# Altium PCB Dispenser.PcbDoc
Units mil, origin at the board's own origin, x right, y up, seen from the top; angles counter-clockwise.
Board outline 1905 x 1590 mil, 2 copper layers (Top Layer, Bottom Layer), stack 62.249 mil thick; 21 components, 11 nets, 75 pads, 9 vias.
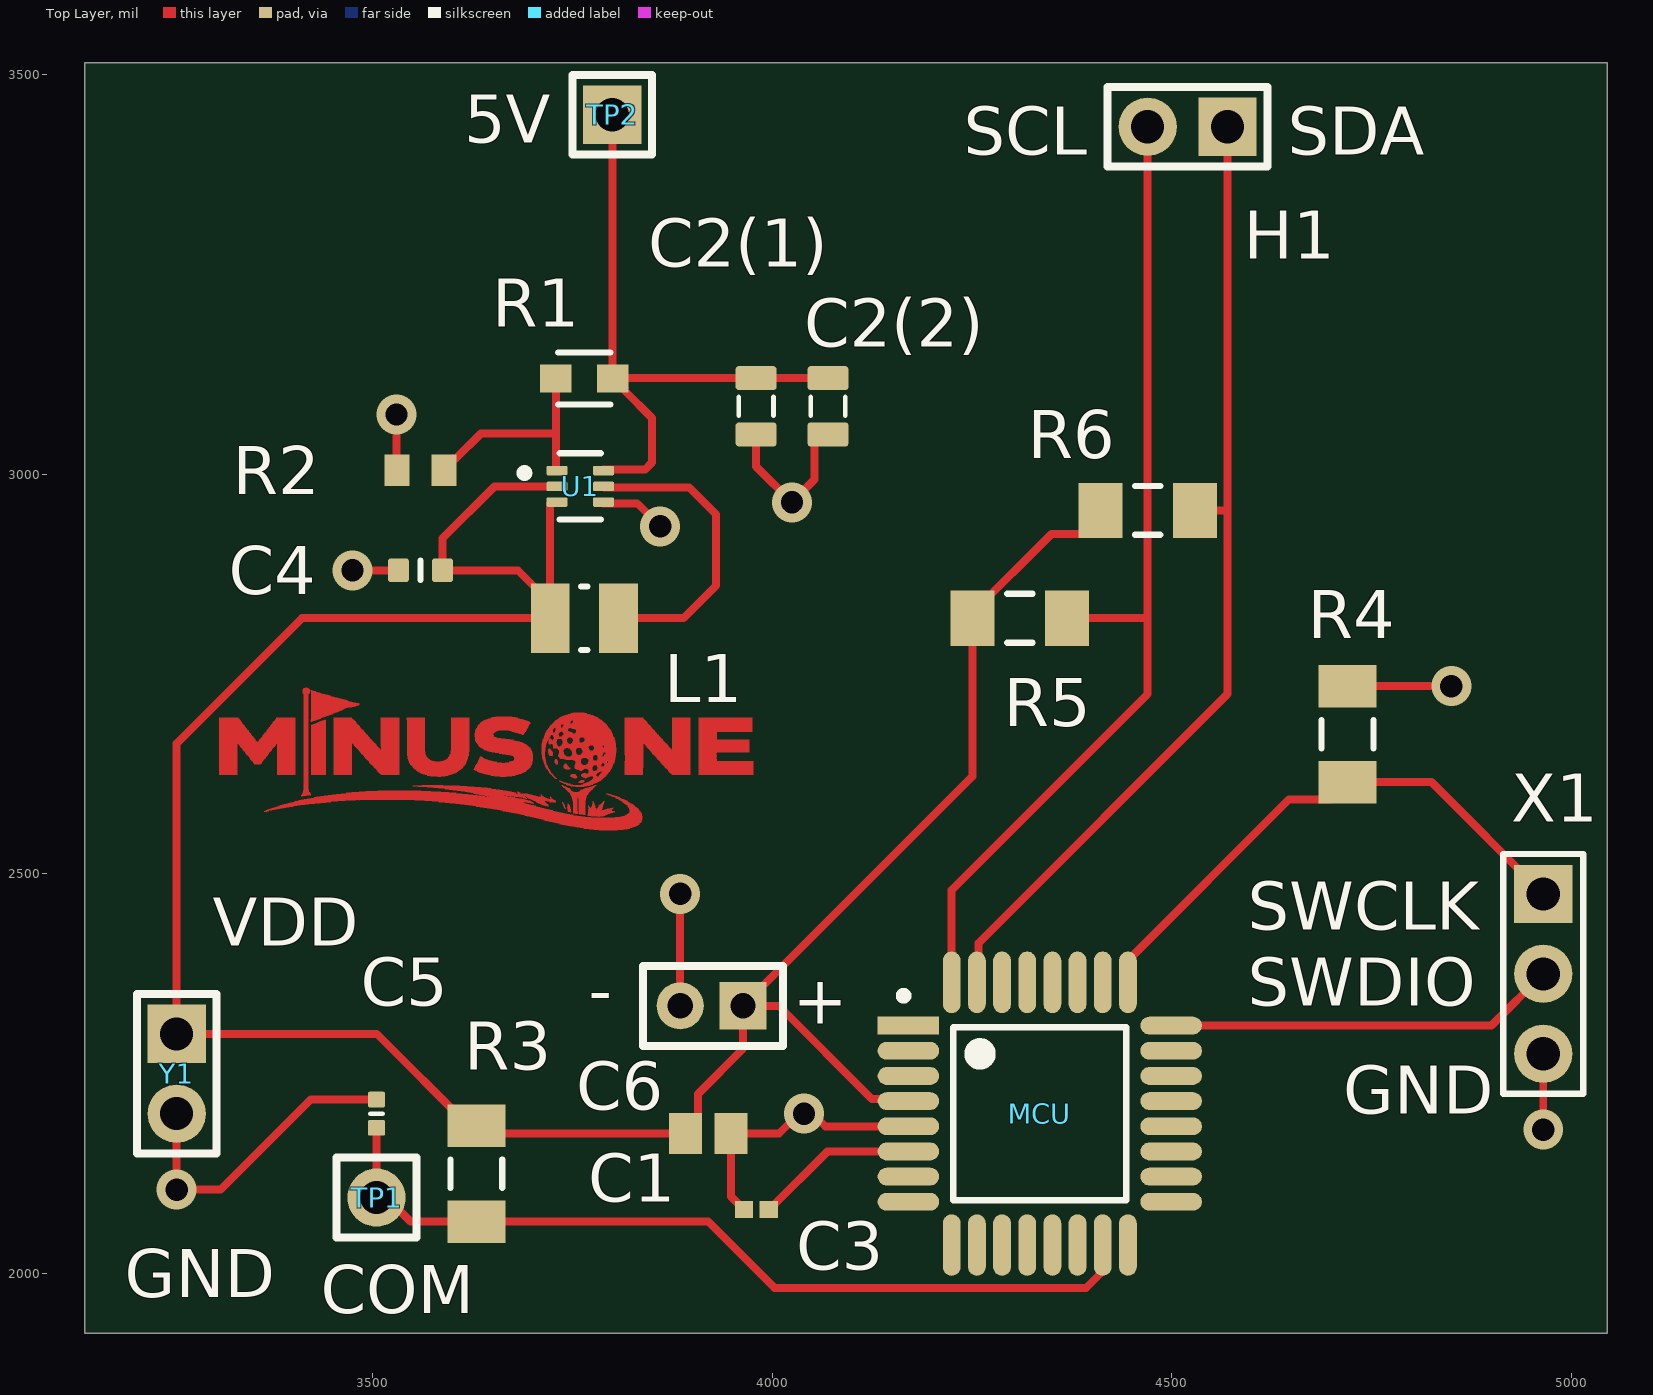
[diagram p0: Top Layer view]
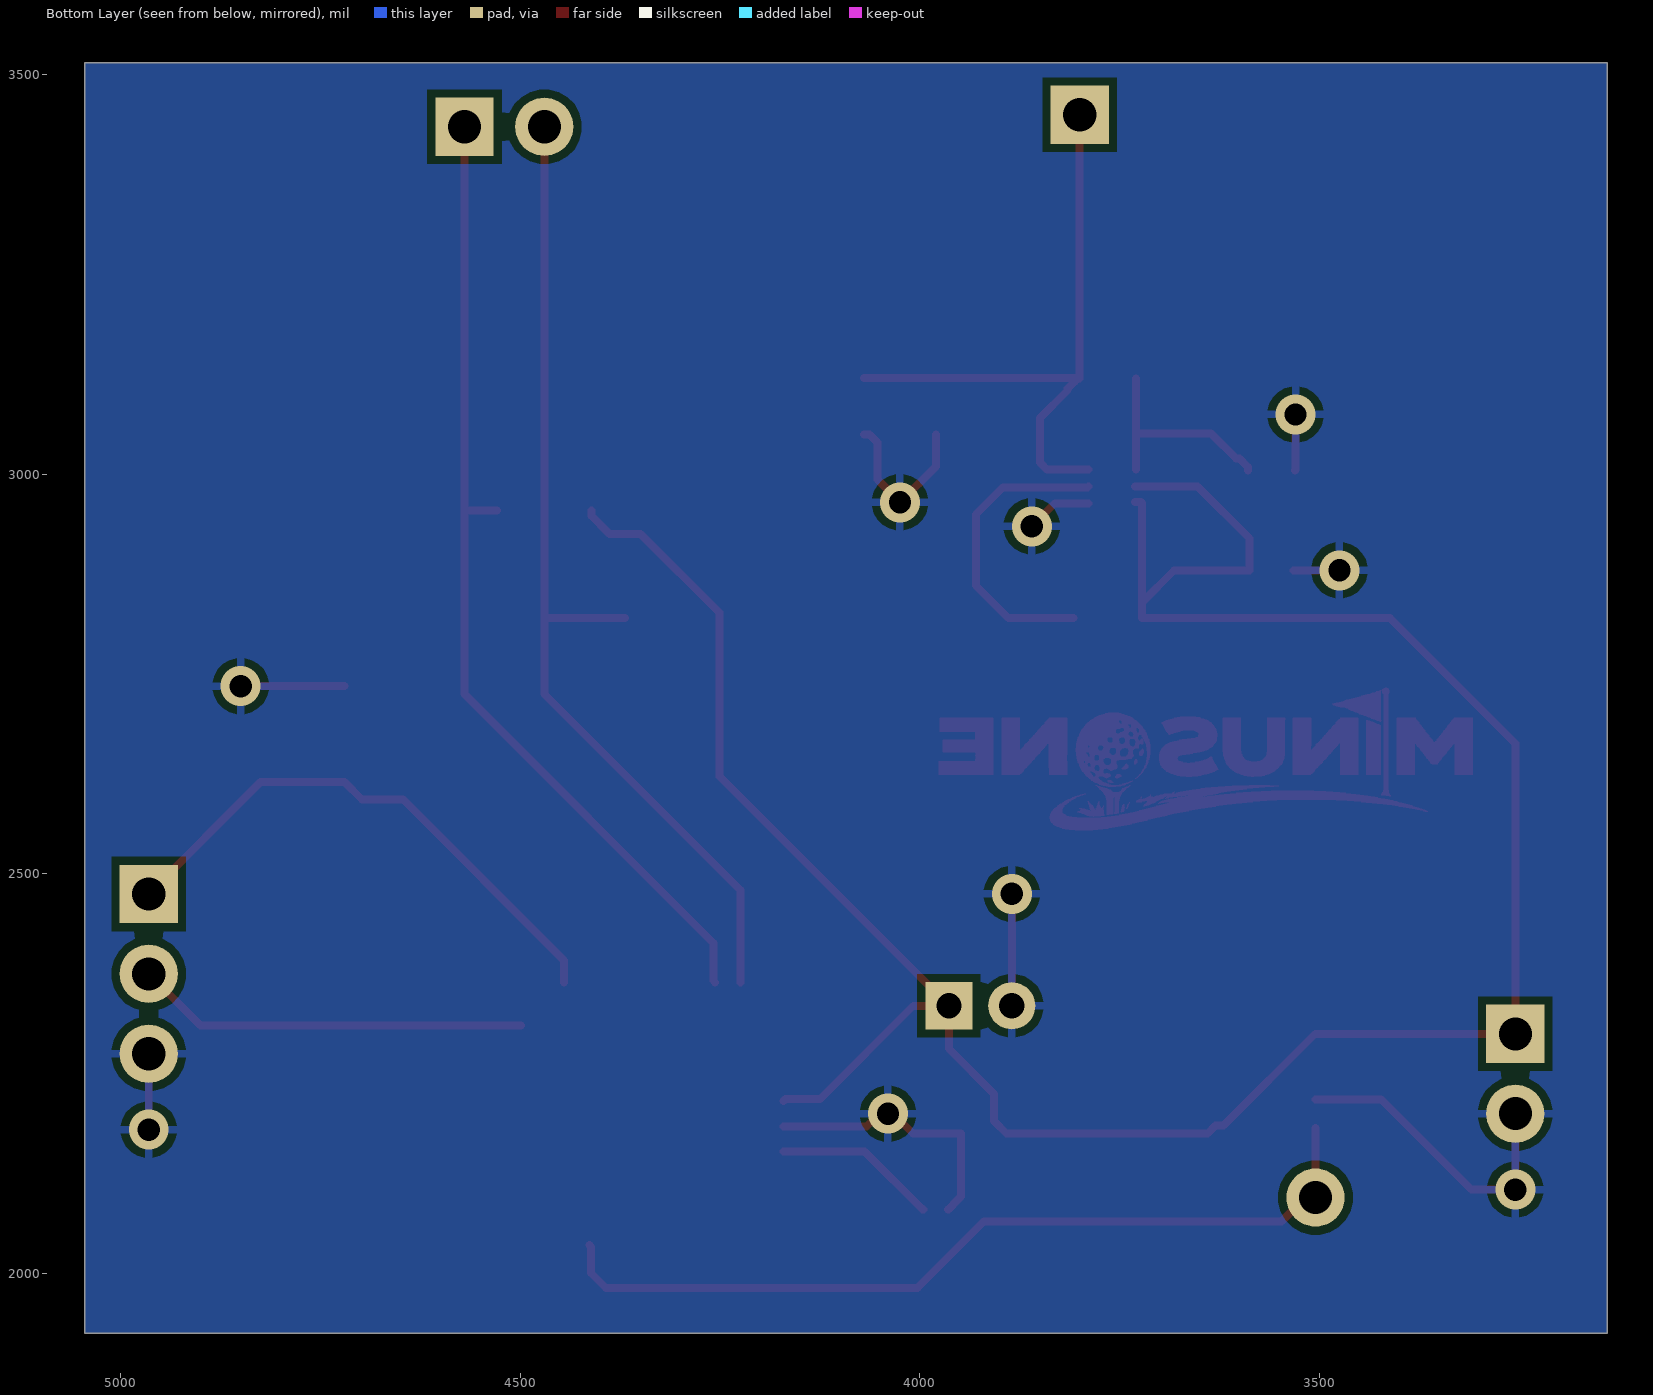
[diagram p1: Bottom Layer view, seen from below]
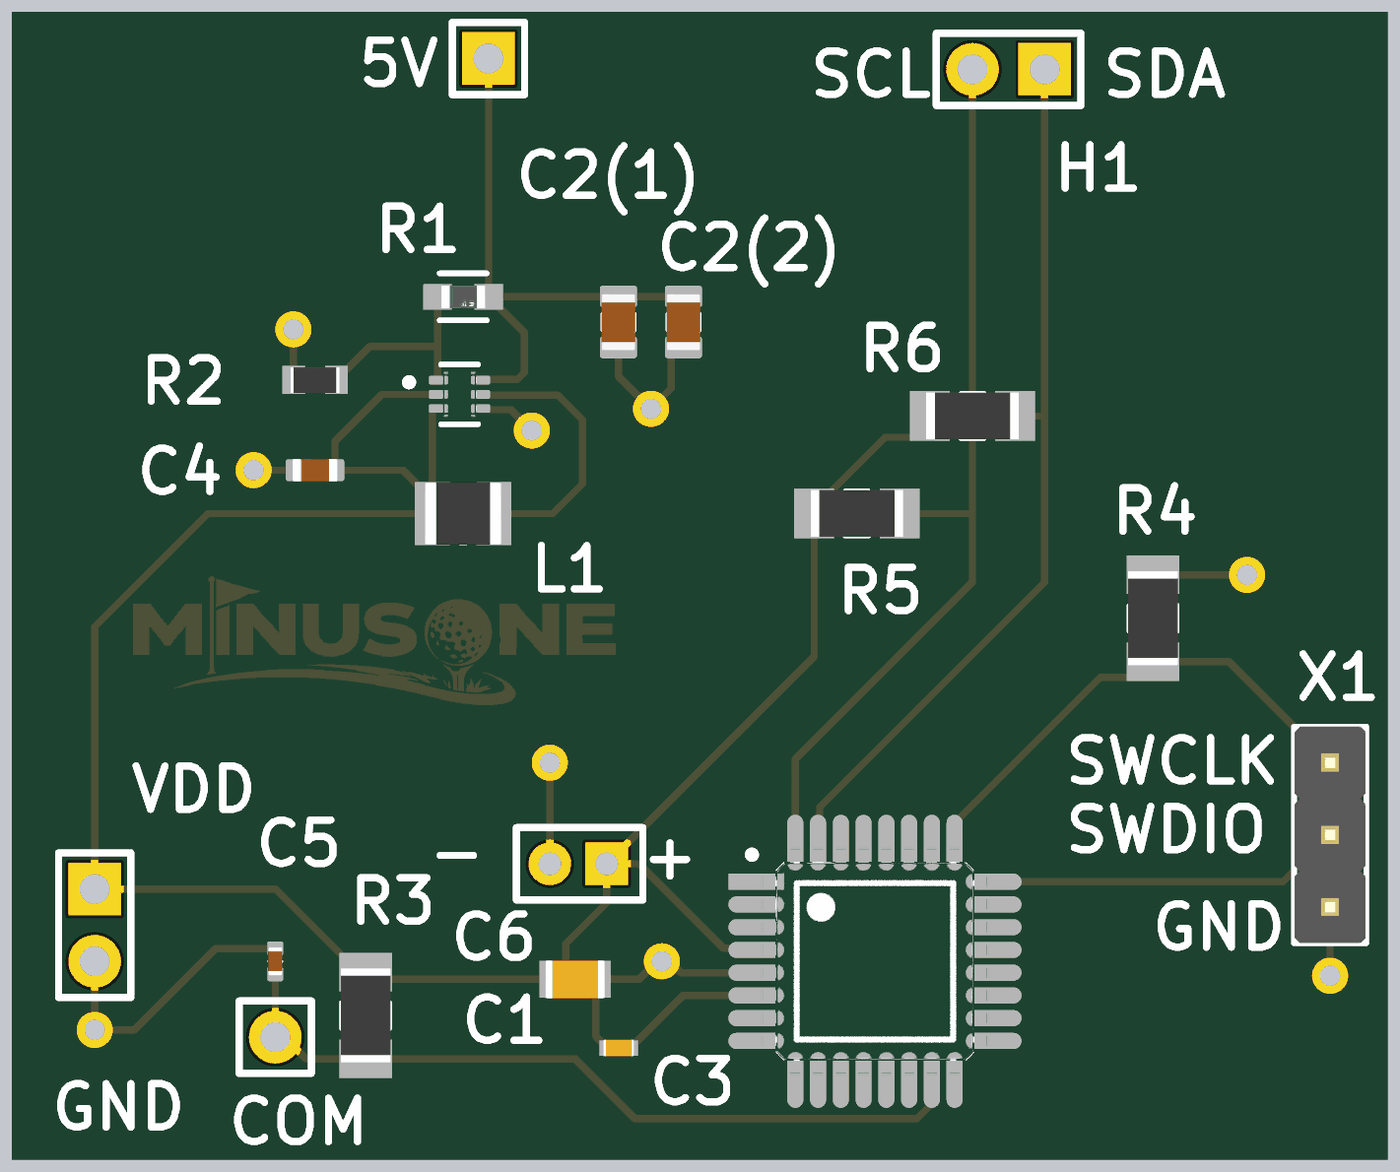
[diagram p2: 3D render of the assembled board from above, using the file's embedded part models]

## Layer stack, top to bottom
Top Solder: solder mask 0.4, Solder Resist, Dk 3.5
Top Layer: signal copper 1.4
Dielectric 1: dielectric 59.4488, FR-4, Dk 4.8
Bottom Layer: signal copper 1.4
Bottom Solder: solder mask 0.4, Solder Resist, Dk 3.5

## Board outline
3140,1925 3140,3515 5045,3515 5045,1925

## Design rules (kind name [scope] priority, off if disabled: settings)
Clearance [All] p1: gap=10 ignorepadtopadclearanceinfootprint=FALSE
PolygonConnect [All] p1: connectstyle=Relief reliefconductorwidth=10 reliefentries=4 polygonreliefangle="90 Angle" airgapwidth=10
RoutingVias [All] p1: holewidth=28 width=50 viastyle="Through Hole" minholewidth=28 minwidth=50 maxholewidth=28 maxwidth=50
SolderMaskExpansion [All] p1: expansion=0 istentingtop=FALSE
SupplyNets "Schematic Supply Nets_2" [InNet('VDD')] p1: voltage=0.000
SupplyNets "Schematic Supply Nets_1" [InNet('GND')] p2: voltage=0.000
Width [All] p1: maxlimit=10 minlimit=10 preferedwidth=10
30 further rules are at their usual default settings.

## Components (designator, comment, footprint, x,y, rotation, side; value= is the part's Value field where it differs from the comment)
C1 "Capacitor 100 nF +/-10% 50 V 0805" CAPC2013X95X50LL10T25 3920,2175 r0 top value=100nF
C2(1) "Capacitor 22µF +/-40% 16V 0805" CAPC0805(2012)145_L 3980,3085 r270 top value=22µF
C2(2) "Capacitor 22µF +/-40% 16V 0805" CAPC0805(2012)145_L 4070,3085 r270 top value=22µF
C3 "Capacitor 0.1 uF +/- 5% 16 V 0402" CAPC1005X56X25LL10T15 3980.35,2080 r180 top value=100nF
C4 "Capacitor 10µF +/-20% 10V 0603" CAPC0603(1608)100_L 3560,2880 r180 top value=10µF
C5 "Capacitor 100nF +/-20% 10V 0402" CAPC0402(1005)60_L 3505,2200 r90 top value=100nF
C6 "Capacitor Pad" CAP_PAD 3963.74,2335 r180 top
H1 "I2C Header" HEADER_1X02 4570,3435 r180 top
L1 "LQM2HPN1R0MJ0L" INDC2520X120X60NL20T20 3765,2820 r0 top value=1µH
MCU "STM32G030K8T6" FP-LQFP32-5V-IPC_A 4335,2200 r0 top
R1 "CPF0603B732KE" FP-CPF0603-MFG 3765,3120 r180 top value=732KΩ
R2 "Resistor 100k +/-1% 0603 100 mW" RESC1608X55X25ML10T15 3560,3005 r180 top value=100k
R3 "Resistor 10k +/-1% 1206 250 mW" RESC3216X60X45ML15T20 3630,2125 r90 top value=10k
R4 "Resistor 10k +/-1% 1206 250 mW" RESC3216X60X45ML15T20 4720,2675 r90 top value=10k
R5 "Resistor 4k7 +/-1% 1206 250 mW" RESC3116X70X50ML13T20 4310,2820 r180 top value=4.7k
R6 "Resistor 4k7 +/-1% 1206 250 mW" RESC3116X70X50ML13T20 4470,2955 r180 top value=4.7k
TP1 "Lim Switch COM" HEADER_1X01 3505,2095 r90 top
TP2 "5V Pad" PAD_5V 3800,3450 r0 top
U1 "TPS61023DRLR" FP-DRL0006A-MFG 3760,2985 r0 top
X1 "Jumper" PIN_3_JUMPER 4965,2475 r270 top
Y1 "Battery Header" BATTERY_HEADER 3255,2300 r270 top

## Footprints (in the part's own frame and the unit in brackets; to place one, negate y for a bottom-side part, rotate by r counter-clockwise, add the part's x,y. Pads: shape width x height; smd on the part's side, far side on the other; paste and mask are expansions set on the pad)
BATTERY_HEADER [mm] "Battery Header"
  rect 1.85x1.85 hole 1.05 mask+0.102: 1(0,0)
  round 1.85 hole 1.05 mask+0.102: 2(2.54,0)
  silkscreen extent -1.27,-1.27 3.81,1.27
CAP_PAD [mm] "Capacitor solder pads"
  rect 1.5x1.5 hole 0.8 mask+0.102: 1(0,0)
  round 1.5 hole 0.8 mask+0.102: 2(2,0)
  silkscreen extent -1.27,-1.27 3.17,1.27
CAPC0402(1005)60_L [mm] "Chip Capacitor, Body 1.0x0.5mm, Height 0.6mm, IPC High Density"
  rrect25% 0.5x0.55 smd: 1(-0.45,0) 2(0.45,0)
  silkscreen extent 0,-0.2 0,0.2, body extent -0.5,-0.25 0.5,0.25, height 0.6
CAPC0603(1608)100_L [mm] "Chip Capacitor, Body 1.6x0.8mm, Height 1.0mm, IPC High Density"
  rrect25% 0.66x0.76 smd: 1(-0.7,0) 2(0.7,0)
  silkscreen extent 0,-0.3 0,0.3, body extent -0.8,-0.4 0.8,0.4, height 0.95
CAPC0805(2012)145_L [mm] "Chip Capacitor, Body 2.0x1.2mm, Height 1.45mm, IPC High Density"
  rrect25% 0.76x1.3 smd: 1(-0.9,0) 2(0.89,0)
  silkscreen extent -0.3,-0.55 0.3,0.55, body extent -1,-0.6 1,0.6, height 1.45
CAPC1005X56X25LL10T15 [mm] "Chip Capacitor, 2-Leads, Body 1.10x0.60mm, IPC High Density"
  rect 0.58x0.54 smd: 1(-0.39,0) 2(0.39,0)
  body extent -0.55,-0.3 0.55,0.3, height 0.56
CAPC2013X95X50LL10T25 [mm] "Chip Capacitor, 2-Leads, Body 2.10x1.35mm, IPC High Density"
  rect 1.05x1.3 smd: 1(-0.725,0) 2(0.725,0)
  body extent -1.05,-0.67 1.05,0.67, height 0.95
FP-CPF0603-MFG [mm]
  rect 1x0.9 smd paste+0 mask+0: 1(-0.9,0) 2(0.9,0)
  silkscreen extent -0.82,-0.82 0.82,0.82, body extent -1.5,-0.55 1.5,0.55, height 0.25
FP-DRL0006A-MFG [mm]
  rrect33% 0.67x0.3 smd paste+0 mask+0: 1(-0.74,0.5) 2(-0.74,0) 3(-0.74,-0.5) 4(0.74,-0.5) 5(0.74,0) 6(0.74,0.5)
  silkscreen extent -1.9,-1.05 0.65,1.05, body extent -1.17,-1.1 1.17,1.1, height 0.25
FP-LQFP32-5V-IPC_A [mm]
  rect 1.955x0.566 smd paste+0 mask+0: 1(-4.175,2.8)
  rrect100% 1.955x0.566 smd paste+0 mask+0: 2(-4.175,2) 3(-4.175,1.2) 4(-4.175,0.4) 5(-4.175,-0.4) 6(-4.175,-1.2) 7(-4.175,-2) 8(-4.175,-2.8) 17(4.175,-2.8) 18(4.175,-2) 19(4.175,-1.2) 20(4.175,-0.4) 21(4.175,0.4) 22(4.175,1.2) 23(4.175,2) 24(4.175,2.8)
  rrect100% 0.566x1.955 smd paste+0 mask+0: 9(-2.8,-4.175) 10(-2,-4.175) 11(-1.2,-4.175) 12(-0.4,-4.175) 13(0.4,-4.175) 14(1.2,-4.175) 15(2,-4.175) 16(2.8,-4.175) 25(2.8,4.175) 26(2,4.175) 27(1.2,4.175) 28(0.4,4.175) 29(-0.4,4.175) 30(-1.2,4.175) 31(-2,4.175) 32(-2.8,4.175)
  silkscreen extent -4.45,-2.75 2.75,3.87, body extent -5.65,-5.65 5.65,5.65, height 0.25
HEADER_1X01 [mm]
  round 1.85 hole 1.05 mask+0.102: 1(0,0)
  silkscreen extent -1.27,-1.27 1.27,1.27
HEADER_1X02 [mm] "Jumper"
  rect 1.85x1.85 hole 1.05 mask+0.102: 1(0,0)
  round 1.85 hole 1.05 mask+0.102: 2(2.54,0)
  silkscreen extent -1.27,-1.27 3.81,1.27
INDC2520X120X60NL20T20 [mm] "Chip Inductor, 2-Leads, Body 2.70x2.20mm, IPC Medium Density"
  rect 1.23x2.22 smd: 1(-1.085,0) 2(1.085,0)
  silkscreen extent -0.1,-1.01 0.1,1.01, body extent -1.35,-1.1 1.35,1.1, height 1.2
PAD_5V [mm]
  rect 1.85x1.85 hole 1.05 mask+0.102: 1(0,0)
  silkscreen extent -1.27,-1.27 1.27,1.27
PIN_3_JUMPER [mm]
  rect 1.85x1.85 hole 1.05 mask+0.102: 1(0,0)
  round 1.85 hole 1.05 mask+0.102: 2(2.54,0) 3(5.08,0)
  silkscreen extent -1.27,-1.27 6.35,1.27, body extent -1.27,-1.24 6.35,1.24, height 8.38
RESC1608X55X25ML10T15 [mm] "Chip Resistor, 2-Leads, Body 1.70x0.90mm, IPC Low Density"
  rect 0.8x1 smd: 1(-0.75,0) 2(0.75,0)
  body extent -0.85,-0.45 0.85,0.45, height 0.55
RESC3116X70X50ML13T20 [mm] "Chip Resistor, 2-Leads, Body 3.25x1.65mm, IPC Low Density"
  rect 1.4x1.75 smd: 1(-1.5,0) 2(1.5,0)
  silkscreen extent -0.4,-0.77 0.4,0.77, body extent -1.63,-0.82 1.63,0.82, height 0.7
RESC3216X60X45ML15T20 [mm] "Chip Resistor, 2-Leads, Body 3.3x1.75mm, IPC Low Density"
  rect 1.35x1.85 smd: 1(-1.525,0) 2(1.525,0)
  silkscreen extent -0.45,-0.82 0.45,0.82, body extent -1.65,-0.87 1.65,0.87, height 0.6

## Part data
C1: library part CMP-001-00018-6, "Chip Capacitor, 100 nF, +/- 10%, 50 V, 0805 (2012 Metric)", Capacitor Type=Ceramic, Case/Package=0805, Max Operating Temperature=125°C, Min Operating Temperature=-55°C, Tolerance=10%, Voltage Rating=50V, Mounting Technology=SM, Pins=2, RoHS Compliant=True
C2(1) C2(2): library part CMP-001-00081-4, "Chip Capacitor, 22µF +/-40%, 16V, 0805, Thickness 1.45 mm", Case/Package=0805, Max Operating Temperature=85°C, Min Operating Temperature=-55°C, Tolerance=5%, Voltage Rating=16V, Mounting Technology=SMT, Pins=2
C3: library part CMP-001-00001-6, "Chip Capacitor, 0.1 uF, +/- 5%, 16 V, 0402 (1005 Metric)", Capacitor Type=Ceramic, Case/Package=0402, Max Operating Temperature=125°C, Min Operating Temperature=-55°C, Tolerance=5%, Voltage Rating=16V, Mounting Technology=SM, Pins=2, RoHS Compliant=True
C4: library part CMP-001-00075-4, "Chip Capacitor, 10µF +/-20%, 10V, 0603, Thickness 1 mm", Case/Package=0603, Max Operating Temperature=85°C, Min Operating Temperature=-55°C, Tolerance=10%, Voltage Rating=10V, Mounting Technology=SMT, Pins=2
C5: library part CMP-001-00061-3, "Chip Capacitor, 100nF +/-20%, 10V, 0402, Thickness 0.6 mm", Case/Package=0402, Max Operating Temperature=85°C, Min Operating Temperature=-55°C, Tolerance=20%, Voltage Rating=10V, Mounting Technology=SMT, Pins=2
C6: library part CAP_PAD
H1: library part HEADER_1X02
L1: library part CMP-006-00008-6, "Chip Inductor, 1 uH, +/- 20%, 1 MHz, -55 to 125 degC, 1008 (2520 Metric), RoHS, Tape and Reel", Case/Package=1008, Current Rating=1.5A, Manufacturer=Murata, Max Operating Temperature=85°C, Min Operating Temperature=-40°C, Package Description="2-Pin Surface Mount Device, Body 2.5 x 2 mm", Package Quantity=3000, Resistance=0.09Ohm, Self Resonant Frequency=70MHz, Tolerance=20%, Core Material=Ferrite, Datasheet URL=http://psearch.en.murata.com/inductor/product/LQM2HPN1R0MJ0%23.pdf, Datasheet Version=Aug-16, Mounting Technology=SM, Package Reference=1008, Packaging=TapeandReel, RoHS Compliant=True, Shielding=Shielded
MCU: library part CMP-12105-000136-1, "IC MCU 32BIT 64KB FLASH 32LQFP", RoHS Compliant=Yes
R1: library part CMP-03211-008829-1, "RES SMD 732KΩ 0.1% 1/16W 0603", Manufacturer="TE Connectivity", Package=CPF0603, Power Rating=0.063W, Resistance=732KΩ, Temperature="-55°C to +155°C", Temperature Coefficient=25ppm/°C, Temperature Range High=+155°C, Temperature Range Low=-55°C, Tolerance=0.1%, Voltage Rating=50V, Automotive=No, Category=Res, ComponentLink2Description=Datasheet, ComponentLink2URL=https://www.te.com/commerce/DocumentDelivery/DDEController?Action=showdoc&DocId=Data+Sheet%7F1773200%7FM%7Fpdf%7FEnglish%7FENG_DS_1773200_M.pdf%7F3-1676481-2, Composition="Thin Film", Device Class L1="Passive Components", Device Class L2=Resistors, Device Class L3="Chip SMD Resistors", Height=0.55mm, Ipc Land Pattern Name=RESC15580X45, Lead Free=Yes, Manufacturer Part Number=CPF0603B732KE, Octopart=https://octopart.com/cpf0603b732ke-te+connectivity-80329877, octopart_url=https://octopart.com/cpf0603b732ke-te+connectivity-80329877, Packaging="5k Reel", RoHS=TRUE, Series=CPF
R2: library part CMP-009-00023-5, "Chip Resistor, 100 KOhm, +/- 1%, 0.1 W, -55 to 155 degC, 0603 (1608 Metric)", Case/Package=0603, Max Operating Temperature=155°C, Min Operating Temperature=-55°C, Power=100mW, Tolerance=1%, Voltage Rating=50V, Mounting Technology=SM, Pins=2, RoHS Compliant=True
R3 R4: library part CMP-009-00016-5, "Chip Resistor, 10 KOhm, +/- 1%, 0.25 W, -55 to 155 degC, 1206 (3216 Metric)", Case/Package=1206, Max Operating Temperature=155°C, Min Operating Temperature=-55°C, Power=250mW, Tolerance=1%, Voltage Rating=200V, Mounting Technology=SM, Pins=2, RoHS Compliant=True
R5 R6: library part CMP-009-00033-5, "Chip Resistor, 4.7 KOhm, +/- 1%, 0.25 W, -55 to 155 degC, 1206 (3216 Metric)", Case/Package=1206, Max Operating Temperature=155°C, Min Operating Temperature=-55°C, Power=250mW, Tolerance=1%, Voltage Rating=200V, Mounting Technology=SM, Pins=2, RoHS Compliant=True
TP1: library part HEADER_1X01
TP2: library part PAD_5V
U1: library part CMP-04918-000638-1, "FINISH GOODS FOR TPS61023"
X1: library part PIN_3_JUMPER
Y1: library part BATTERY_HEADER

## Via types
v1: diameter 50, hole 28, Top Layer to Bottom Layer, 9 vias

## Nets (pads, with @x,y where several pads share a name; then routed paths per layer and width w, separated by ;. In a path a pad name is that pad's centre, name@x,y a point inside that pad or via, vN(x,y) a via of type N, cw(c..) or ccw(c..) an arc to the next point about the centre after c; other vN are vias at no path point)
GND: C1.2 C2(1).2 C2(2).2 C3.2 C4.2 C5.2 C6.2 MCU.5 R2.2 R4.2 U1.4 X1.3 Y1.2 | length 1519.6
  Top Layer w10: Y1.2 v1(3255,2105) 3310,2105 3422.72,2217.72 C5.2 ; v1(3475,2880) C4.2 ; v1(3530,3075) 3530,3005.47 R2.2 ; U1.4@3789.13,2963.78 3831.22,2963.78 v1(3860,2935) ; C6.2 v1(3885,2475) ; C3.2 3964.21,2080 3958.58,2085.63 3958.58,2086.42 3948.54,2096.46 C1.2 4008.43,2175 4033.43,2200 v1(4040,2200) 4050.82,2200 4066.57,2184.25 MCU.5 ; 3980,3049.96 3980,3010 v1(4025,2965) 4025,2965.27 4053.15,2993.42 4053.15,3040 4063.11,3049.96 4070,3049.96 ; R4.2 v1(4850,2735.04) ; v1(4965,2180) X1.3
NetC2(1)_1: C2(1).1 C2(2).1 R1.1 TP2.1 U1.6 | length 784.1
  Top Layer w10: U1.6@3789.13,3005.91 3840.8,3005.91 3849.89,3015 3849.89,3070.54 3815.12,3105.31 3815.12,3107.28 R1.1@3805.98,3116.42 ; TP2.1 3800.43,3449.57 R1.1 3800.87,3120.43 3980,3120.43 4070,3120.43
NetC3_1: C3.1 MCU.6 | length 205
  Top Layer w10: C3.1 3996.5,2080 4069.25,2152.76 MCU.6
NetC5_1: C5.1 MCU.15 R3.1 TP1.1 | length 1084.2
  Top Layer w10: C5.1 TP1.1 3517.64,2095 3547.68,2064.96 R3.1 3920.04,2064.96 4002.88,1982.12 4393.07,1982.12 4411.39,2000.44 4411.39,2033.26 MCU.15
NetH1_1: H1.1 MCU.31 R6.1 | length 1241.5
  Top Layer w10: MCU.31 4258.61,2366.74 4258.61,2413.61 4570,2725 H1.1 ; R6.1 4570,2955
NetH1_2: H1.2 MCU.32 R5.1 | length 1273.1
  Top Layer w10: MCU.32 4224.76,2479.76 4470,2725 4470,2820 ; R5.1 4470,2820 ; H1.2 4470,2820
NetL1_2: L1.2 U1.5 | length 383.8
  Top Layer w10: U1.5 3790.35,2983.78 3896.22,2983.78 3930,2950 3930,2860.7 3889.3,2820 L1.2
NetMCU_24: MCU.24 X1.2 | length 492.4
  Top Layer w10: MCU.24 4900.24,2310.24 X1.2
NetMCU_25: MCU.25 R4.1 X1.1 | length 697.5
  Top Layer w10: MCU.25 4445.24,2391.74 4646.88,2593.39 4698.43,2593.39 R4.1 4825.04,2614.96 X1.1
NetR1_2: R1.2 R2.1 U1.1 | length 275.2
  Top Layer w10: R2.1 3589.53,3008.94 3600.28,3019.69 3604.21,3019.69 3635.77,3051.24 3729.57,3051.24 ; U1.1@3729.57,3006.34 3729.57,3051.24 ; R1.2 3729.57,3051.24
VDD: C1.1 C4.1 C6.1 L1.1 MCU.4 R3.2 R5.2 R6.2 U1.2 U1.3 Y1.1 | length 3372.6
  Top Layer w10: U1.3 3723.58,2965.32 3722.28,2964.02 L1.1@3722.28,2839.49 ; U1.2 3652.56,2985 3587.56,2920 C4.1 3681.77,2880 L1.1@3722.28,2839.49 ; MCU.4 4168.26,2218.1 4125.17,2218.1 4008.27,2335 C6.1 ; R6.2 4410.94,2948.11 4388.39,2925.55 4349.61,2925.55 4250.94,2826.89 R5.2 4250.94,2622.2 C6.1 ; L1.1@3722.28,2839.49 L1.1 3411.89,2820 3255,2663.11 Y1.1 3505.2,2300 3620.16,2185.04 R3.2 3640.04,2175 C1.1 3907.13,2190.67 3907.13,2224.72 3963.74,2281.34 C6.1
pads on no net: MCU.1 MCU.2 MCU.3 MCU.7 MCU.8 MCU.9 MCU.10 MCU.11 MCU.12 MCU.13 MCU.14 MCU.16 MCU.17 MCU.18 MCU.19 MCU.20 MCU.21 MCU.22 MCU.23 MCU.26 MCU.27 MCU.28 MCU.29 MCU.30

## Polygon pours and split planes (outlines as drawn)
GND on Bottom Layer "GND_L02_P000" (solid, pour order 0): 3140,1925 3140,3515 5045,3515 5045,1925 3140,1925

## Other copper
Top Layer:
  drawing of 28 lines, arcs and shapes, not listed

## Silkscreen, mask and mechanical layers (free items; w line width, h text height)
Mechanical 1:
  lines w0: 3140,1925 5045,1925 ; 3140,1925 3140,3515 ; 3140,1925 5045,1925 ; 3140,1925 3140,3515 ; 3140,3515 5045,3515 ; 3140,3515 5045,3515 ; 5045,1925 5045,3515 ; 5045,1925 5045,3515

## Text inside footprints (layer, text, board x,y; h text height)
C6: Top Overlay "+" at 4095,2364.39 h60 r180; Top Overlay "-" at 3800,2369.99 h60 r180
H1: Top Overlay "SCL" at 4240,3400 h60; Top Overlay "SDA" at 4645,3400 h60
TP1: Top Overlay "COM" at 3435,1950 h60
TP2: Top Overlay "5V" at 3615,3415 h60
X1: Top Overlay "GND" at 4715,2200 h60; Top Overlay "SWDIO" at 4595,2335 h60; Top Overlay "SWCLK" at 4595,2430 h60
Y1: Top Overlay "VDD" at 3300,2410 h60; Top Overlay "GND" at 3190,1970 h60